# EAGLE board fretscanner-SHIFTREG (EAGLE 6.6.0)
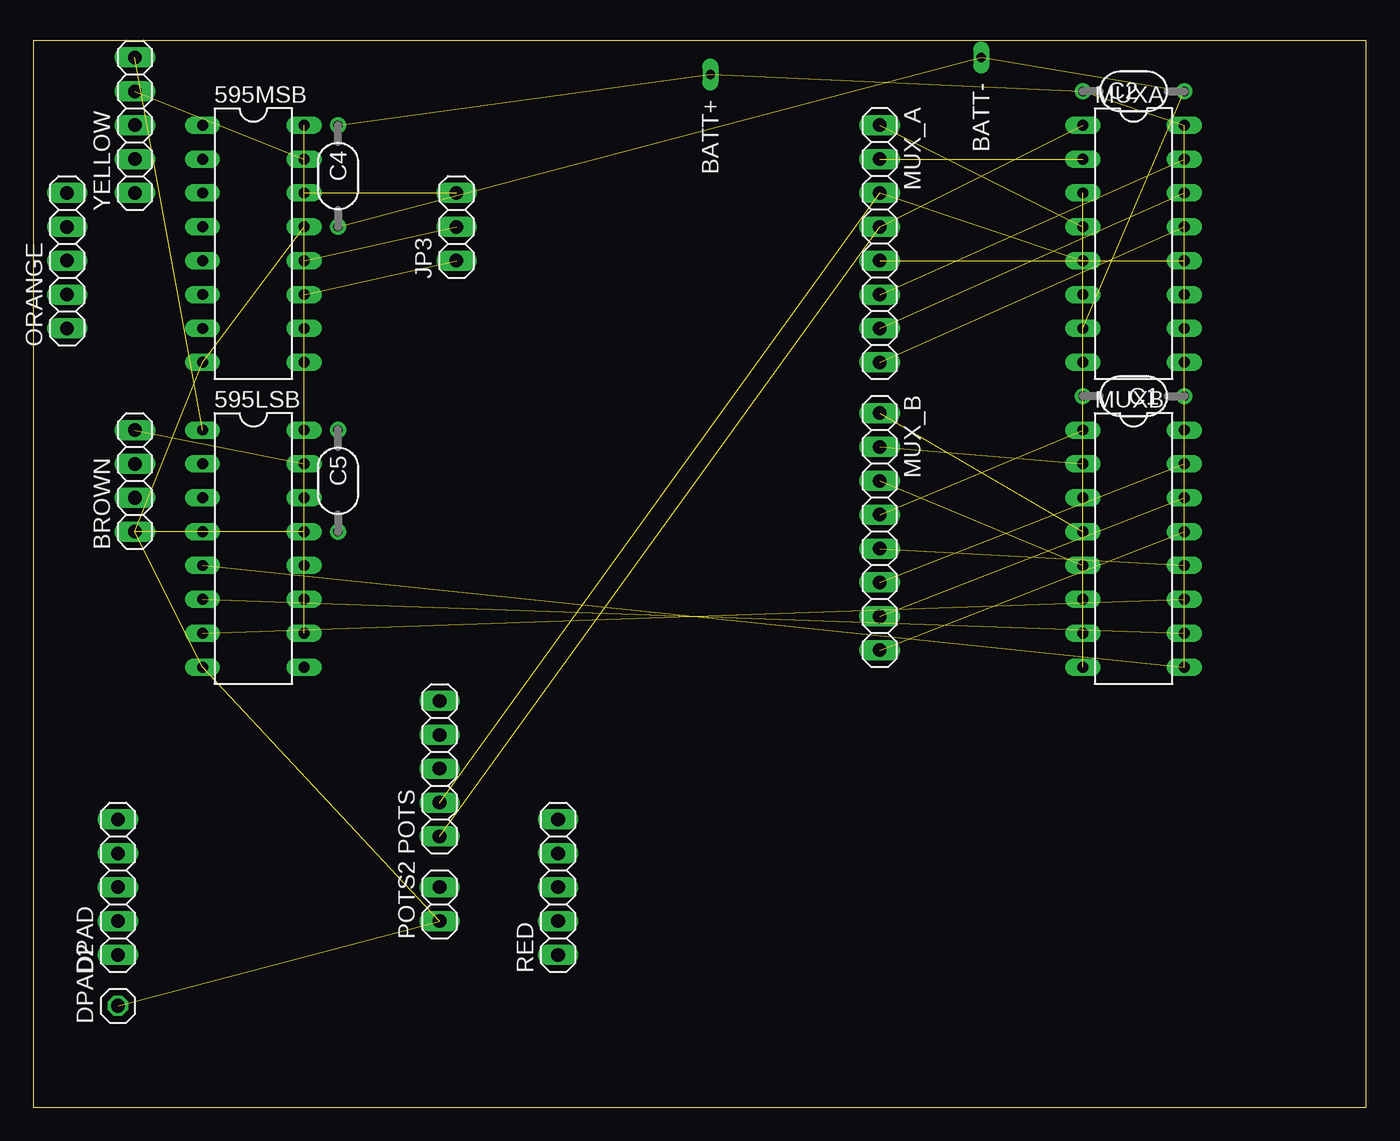
[diagram p0: board, top side]
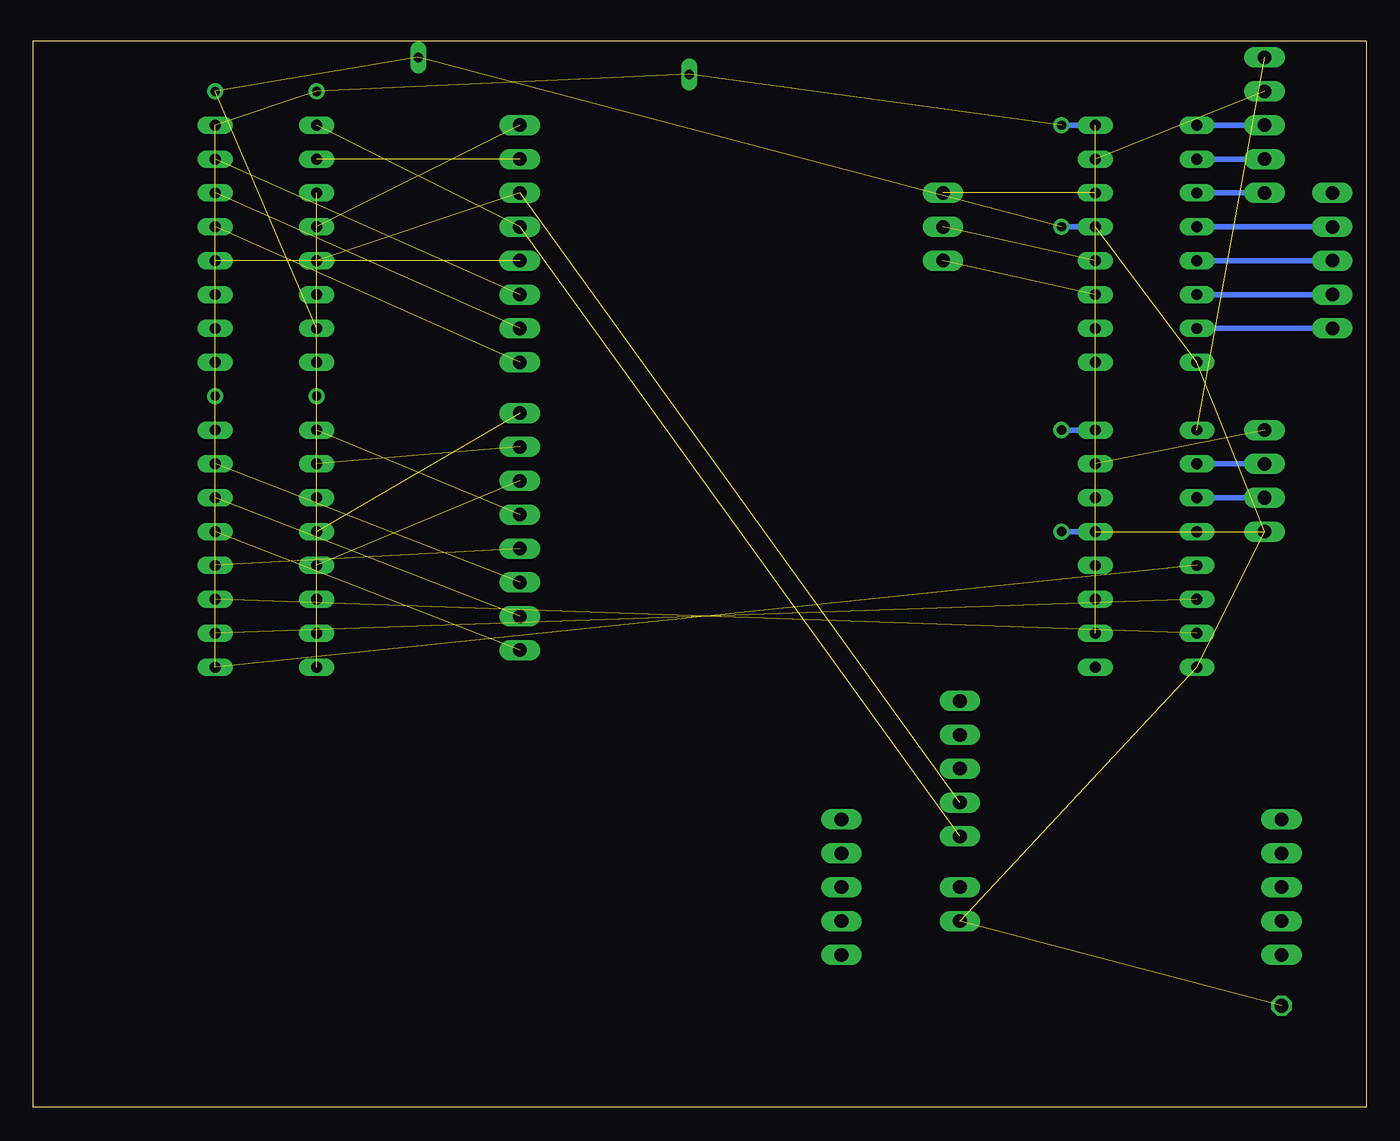
[diagram p1: board, bottom side, seen from below]

Size 100 x 80 mm. Coordinates in mm from the lower left corner, seen from the top.
Outline: 0,0 100,0 100,80 0,80 0,0
Copper layers (1*16): Top 0.035mm / dielectric 1.5mm / Bottom 0.035mm
Design rules "default": minimum track width 10mil, minimum drill 24mil, track to track 8mil, track to pad 8mil, pad to pad 8mil, via to via 8mil, smd to smd 8mil, copper to edge 40mil, drill to drill 8mil, minimum pad ring 10mil, minimum via ring 8mil, stop-mask expansion 4mil, vias tented up to drill 0mil, thermal gap 10mil

## Footprints (pad centres in the part's own frame; a part is rotated, then mirrored left to right if it is on the bottom)
DIL16 = drill 0.813 long: 1 -8.89,-3.81; 2 -6.35,-3.81; 3 -3.81,-3.81; 4 -1.27,-3.81; 5 1.27,-3.81; 6 3.81,-3.81; 7 6.35,-3.81; 8 8.89,-3.81; 9 8.89,3.81; 10 6.35,3.81; 11 3.81,3.81; 12 1.27,3.81; 13 -1.27,3.81; 14 -3.81,3.81; 15 -6.35,3.81; 16 -8.89,3.81
LONG = drill 0.7 long: 1 0,0
1X04 = drill 1.016 long: 1 -3.81,0; 2 -1.27,0; 3 1.27,0; 4 3.81,0
050X030_050_3 = drill 0.7: 1 -3.81,0; 2 3.81,0
1X05 = drill 1.016 long: 1 -5.08,0; 2 -2.54,0; 3 0,0; 4 2.54,0; 5 5.08,0
1X01 = drill 1.016 octagon: 1 0,0
1X03 = drill 1.016 long: 1 -2.54,0; 2 0,0; 3 2.54,0
1X08 = drill 1.016 long: 1 -8.89,0; 2 -6.35,0; 3 -3.81,0; 4 -1.27,0; 5 1.27,0; 6 3.81,0; 7 6.35,0; 8 8.89,0
1X02 = drill 1.016 long: 1 -1.27,0; 2 1.27,0

## Placement (x,y rotation side)
595LSB  74LS595N  [DIL16]  16.51,41.91 270 top
595MSB  74LS595N  [DIL16]  16.51,64.77 270 top
BATT+  [LONG]  50.8,77.47 270 top
BATT-  [LONG]  71.12,78.74 270 top
BROWN  [1X04]  7.62,46.99 90 top
C1  100n  [050X030_050_3]  82.55,53.34 180 top
C2  100n  [050X030_050_3]  82.55,76.2 0 top
C4  100n  [050X030_050_3]  22.86,69.85 270 top
C5  100n  [050X030_050_3]  22.86,46.99 270 top
DPAD  [1X05]  6.35,16.51 90 top
DPAD2  [1X01]  6.35,7.62 90 top
JP3  [1X03]  31.75,66.04 90 top
MUX_A  [1X08]  63.5,64.77 270 top
MUX_B  [1X08]  63.5,43.18 270 top
MUXA  4051N  [DIL16]  82.55,64.77 270 top
MUXB  4051N  [DIL16]  82.55,41.91 270 top
ORANGE  [1X05]  2.54,63.5 90 top
POTS  [1X05]  30.48,25.4 90 top
POTS2  [1X02]  30.48,15.24 90 top
RED  [1X05]  39.37,16.51 90 top
YELLOW  [1X05]  7.62,73.66 90 top

## Library data of the parts
595LSB 595MSB = 74xx-us
BATT+ BATT- = gm-supply
BROWN DPAD DPAD2 JP3 MUX_A MUX_B ORANGE POTS POTS2 RED YELLOW = pinhead
C1 C2 C4 C5 = gm-caps-ceramic
MUXA MUXB = 40xx

## Nets
A_IN: MUXA.3 MUXB.3
BACK: POTS.4
D0: RED.5
D2: RED.4
D3: RED.3
D4: RED.2
D5: RED.1
D_DOWN: DPAD.1
D_LEFT: DPAD.2
D_RIGHT: DPAD.3
D_UP: DPAD.4
GND: 595LSB.8 595LSB.13 595MSB.8 595MSB.13 BATT-.1 BROWN.1 C1.2 C2.2 C4.2 C5.2 DPAD2.1 MUXA.7 MUXA.8 MUXB.7 MUXB.8 POTS2.1
INH_A: MUXA.6
INH_B: MUXB.6
JOY_X: MUX_A.1 MUXA.4
JOY_Y: MUX_A.2 MUXA.2
MUX09: MUX_A.8 MUXA.13
N$1: 595LSB.14 595MSB.9
N$3: MUX_A.5 MUXA.12
N$11: MUX_A.6 MUXA.15
N$13: MUX_A.7 MUXA.14
N$14: MUX_B.1 MUXB.4
N$16: MUX_B.2 MUXB.2
N$17: MUX_B.3 MUXB.5
N$19: MUX_B.4 MUXB.1
N$25: MUX_B.5 MUXB.12
N$26: MUX_B.6 MUXB.15
N$27: MUX_B.7 MUXB.14
N$28: MUX_B.8 MUXB.13
ORNG: POTS2.2
POT_A: MUX_A.3 MUXA.5 POTS.2
POT_B: MUX_A.4 MUXA.1 POTS.1
RCK: 595LSB.12 595MSB.12 JP3.2
SCK: 595LSB.11 595MSB.11 JP3.1
SER: 595MSB.14 JP3.3
SIDE_B: POTS.5
SR0: 595LSB.7 MUXA.11 MUXB.11
SR1: 595LSB.6 MUXA.10 MUXB.10
SR2: 595LSB.5 MUXA.9 MUXB.9
SR4: 595LSB.3 BROWN.2
SR5: 595LSB.2 BROWN.3
SR6: 595LSB.1 YELLOW.5
SR7: 595LSB.15 BROWN.4
SR8: 595MSB.7 ORANGE.1
SR9: 595MSB.6 ORANGE.2
SR10: 595MSB.5 ORANGE.3
SR11: 595MSB.4 ORANGE.4
SR12: 595MSB.3 YELLOW.1
SR13: 595MSB.2 YELLOW.2
SR14: 595MSB.1 YELLOW.3
SR15: 595MSB.15 YELLOW.4
START: POTS.3
VA: 595LSB.10 595LSB.16 595MSB.10 595MSB.16 BATT+.1 C1.1 C2.1 C4.1 C5.1 MUXA.16 MUXB.16
X_BUTTON: DPAD.5

## Tracks (layer width: path | path; a pad name or v marks a point on that pad's centre or on a via)
A_IN  (1 unrouted)
GND  (13 unrouted)
  Bottom 0.406: C4.2 595MSB.13 | C5.2 595LSB.13
JOY_X  (1 unrouted)
JOY_Y  (1 unrouted)
MUX09  (1 unrouted)
N$1  (1 unrouted)
N$3  (1 unrouted)
N$11  (1 unrouted)
N$13  (1 unrouted)
N$14  (1 unrouted)
N$16  (1 unrouted)
N$17  (1 unrouted)
N$19  (1 unrouted)
N$25  (1 unrouted)
N$26  (1 unrouted)
N$27  (1 unrouted)
N$28  (1 unrouted)
POT_A  (2 unrouted)
POT_B  (2 unrouted)
RCK  (2 unrouted)
SCK  (2 unrouted)
SER  (1 unrouted)
SR0  (2 unrouted)
SR1  (2 unrouted)
SR2  (2 unrouted)
SR4
  Bottom 0.406: 595LSB.3 BROWN.2
SR5
  Bottom 0.406: BROWN.3 595LSB.2
SR6  (1 unrouted)
SR7  (1 unrouted)
SR8
  Bottom 0.406: ORANGE.1 595MSB.7
SR9
  Bottom 0.406: ORANGE.2 595MSB.6
SR10
  Bottom 0.406: ORANGE.3 595MSB.5
SR11
  Bottom 0.406: ORANGE.4 595MSB.4
SR12
  Bottom 0.406: YELLOW.1 595MSB.3
SR13
  Bottom 0.406: YELLOW.2 595MSB.2
SR14
  Bottom 0.406: YELLOW.3 595MSB.1
SR15  (1 unrouted)
VA  (8 unrouted)
  Bottom 0.406: 595MSB.16 C4.1 | 595LSB.16 C5.1